# Altium PCB HBridge_V2.2.PcbDoc
Units mm, origin at the board's own origin, x right, y up, seen from the top; angles counter-clockwise.
Board outline 33.02 x 31.75 mm, 2 copper layers (Top Layer, Bottom Layer); 37 components, 32 nets, 126 pads, 32 vias.
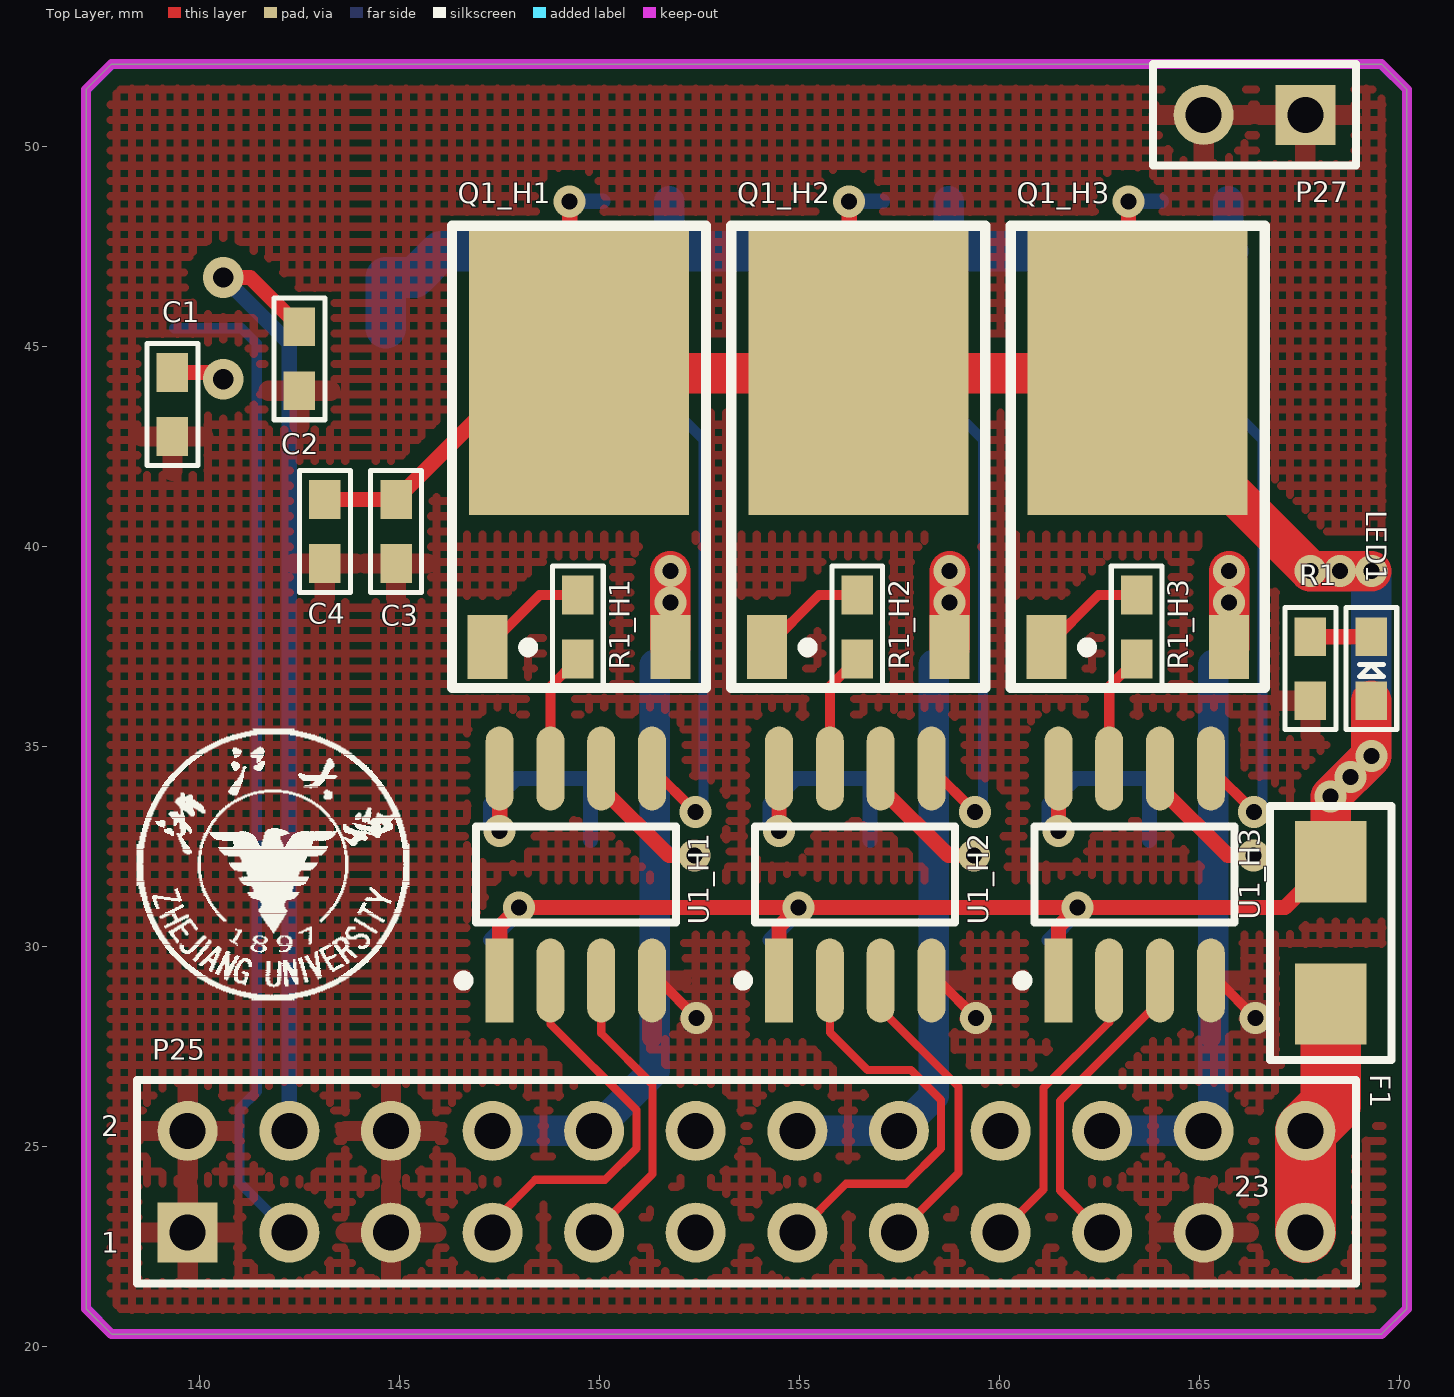
[diagram p0: Top Layer view]
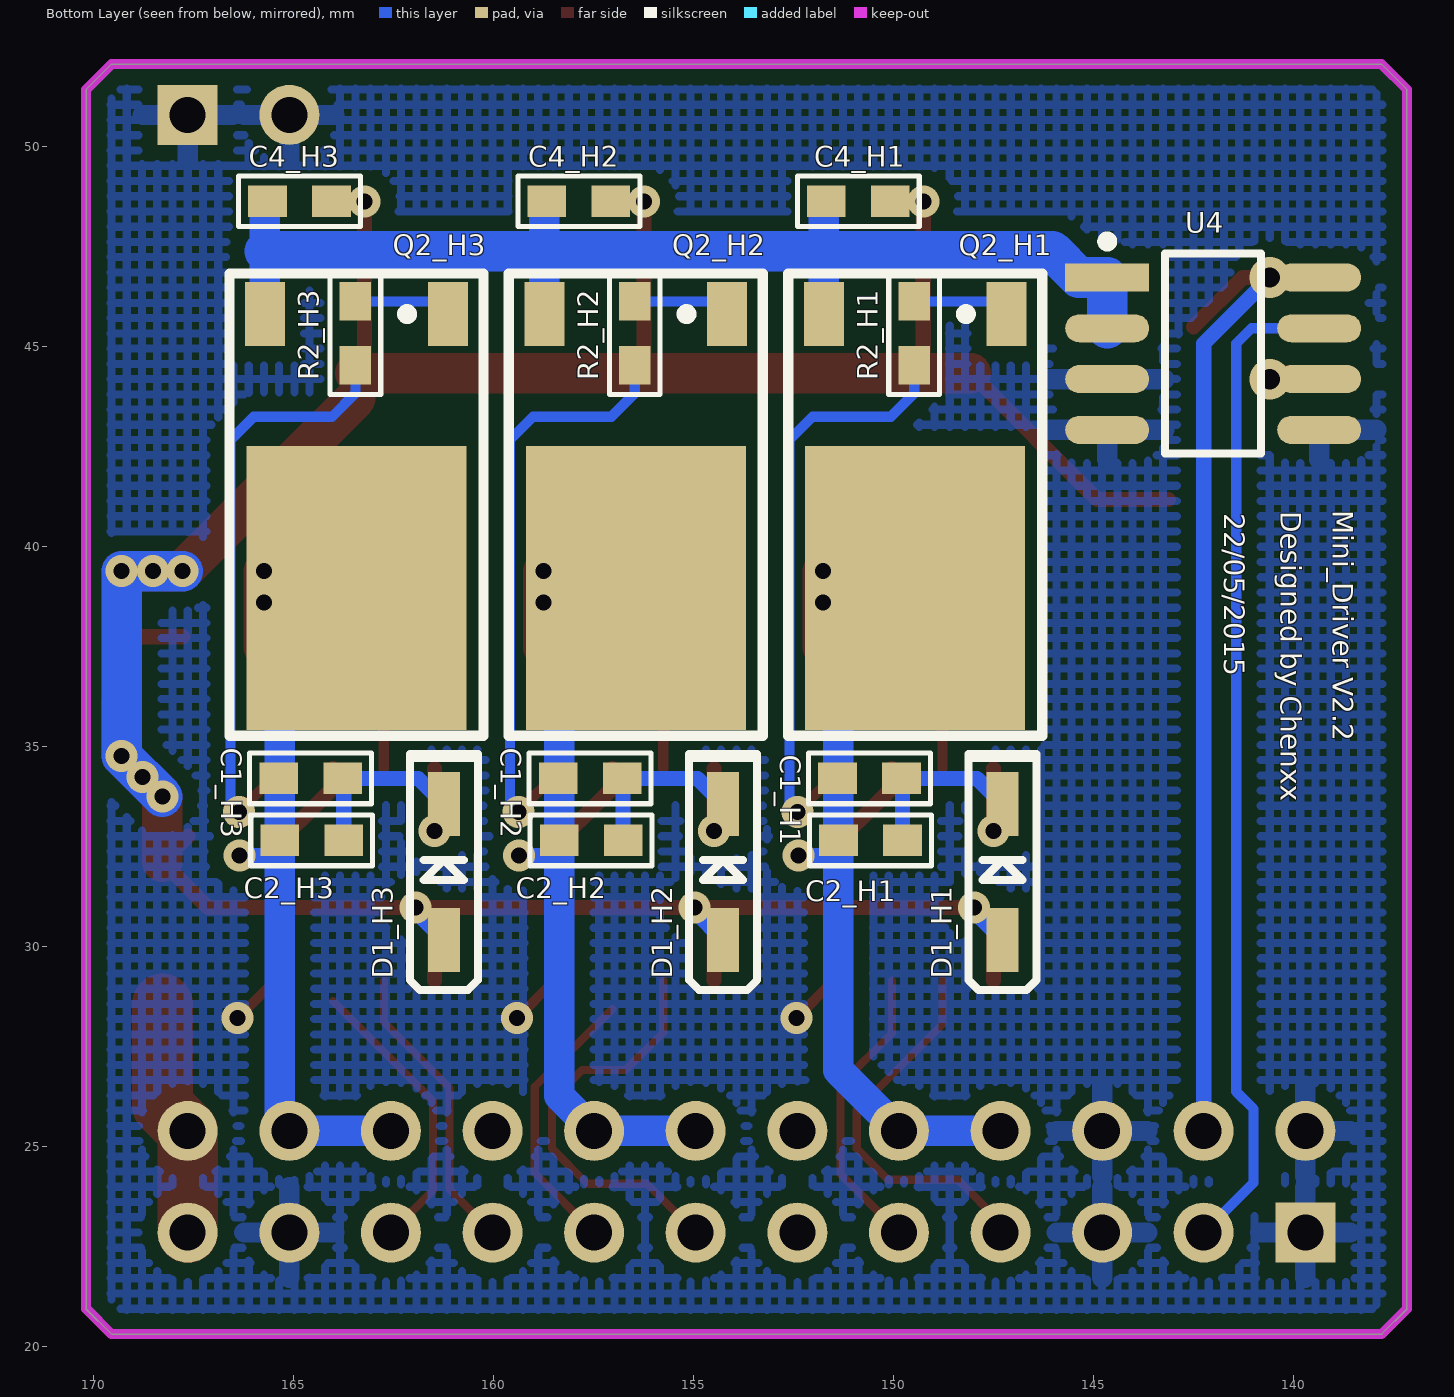
[diagram p1: Bottom Layer view, seen from below]

## Layer stack, top to bottom
Top Layer: signal copper 0.0356
Dielectric: dielectric 0.32, FR-4, Dk 4.8
Bottom Layer: signal copper 0.0356

## Board outline
137.795,52.07 137.16,51.435 137.16,20.955 137.795,20.32 169.545,20.32 170.18,20.955 170.18,51.435 169.545,52.07

## Design rules (kind name [scope] priority, off if disabled: settings)
Clearance Clearance_1 [(InPolygon)] p1: gap=0.381
Clearance [All] p2: gap=0.203
ComponentClearance [All] p1 off: gap=0.254 collisioncheckmode=3 verticalgap=0.254 showdistances=FALSE
Height [All] p1 off: minheight=0 maxheight=25.4 prefheight=12.7
MinimumSolderMaskSliver [All] p1 off: minsoldermaskwidth=0.254
PlaneConnect [All] p1: planeconnectstyle=Relief reliefexpansion=0.508 reliefentries=4 reliefconductorwidth=0.508 reliefairgap=0.254
PolygonConnect PolygonConnect_1 [IsVia] p1: connectstyle=Direct reliefconductorwidth=0.381 reliefentries=4 polygonreliefangle="90 Angle"
PolygonConnect [All] p2: connectstyle=Relief reliefconductorwidth=0.508 reliefentries=4 polygonreliefangle="90 Angle"
RoomDefinition H3 [InComponentClass('H3')] p1: confinementstyle=ConfineIn formatcopy=TRUE lockcomponents=FALSE outline 159.995,27.356 167.005,27.356 167.005,49.53 159.995,49.53
RoomDefinition H2 [InComponentClass('H2')] p2: confinementstyle=ConfineIn formatcopy=TRUE lockcomponents=FALSE outline 153.01,27.356 160.02,27.356 160.02,49.53 153.01,49.53
RoomDefinition H1 [InComponentClass('H1')] p3: confinementstyle=ConfineIn formatcopy=TRUE lockcomponents=FALSE outline 146.025,27.356 153.035,27.356 153.035,49.53 146.025,49.53
RoomDefinition Sheet1 [InComponentClass('Sheet1')] p4: confinementstyle=ConfineIn formatcopy=TRUE lockcomponents=FALSE outline 132.08,17.78 183.794,17.78 183.794,58.42 132.08,58.42
RoutingVias [All] p1: holewidth=0.711 width=1.27 viastyle="Through Hole" minholewidth=0.1 minwidth=0.1 maxholewidth=5 maxwidth=5
SilkToSilkClearance [All] p1 off: silktosilkclearance=0.254
SilkscreenOverComponentPads [All] p1 off: minsilkscreentomaskgap=0.254
SolderMaskExpansion [All] p1: expansion=0.102
TestPointUsage [All] p1: valid=0 allowmultiple=FALSE
Testpoint [All] p1: side=15 testpointundercomponent=TRUE minsize=1.016 maxsize=2.54 preferedsize=1.524 minholesize=0 maxholesize=1.016 preferedholesize=0.813 testpointgrid=0.025 style=1023 order=0123456789
Width [All] p1: maxlimit=2.54 minlimit=0.203 preferedwidth=0.254
18 further rules are at their usual default settings.

## Classes and differential pairs
net class WOUT[1..3]: WOUT1 WOUT2 WOUT3
channel class HalfBridge: H1 H2 H3
component class H3: C1_H3 C2_H3 C4_H3 D1_H3 Q1_H3 Q2_H3 R1_H3 R2_H3 U1_H3
component class H2: C1_H2 C2_H2 C4_H2 D1_H2 Q1_H2 Q2_H2 R1_H2 R2_H2 U1_H2
component class H1: C1_H1 C2_H1 C4_H1 D1_H1 Q1_H1 Q2_H1 R1_H1 R2_H1 U1_H1
net class LIN[1..3]: LIN1 LIN2 LIN3
net class HIN[1..3]: HIN1 HIN2 HIN3
component class Sheet1: C1 C2 C3 C4 F1 LED1 P25 P27 R1 U4

## Components (designator, comment, footprint, x,y, rotation, side; value= is the part's Value field where it differs from the comment)
C1 "1nF" 0603 139.319,43.561 r90 top
C1_H1 "1uF" 0603 150.597,34.214 r0 bottom (schematic designator C1)
C1_H2 "1uF" 0603 157.582,34.214 r0 bottom (schematic designator C1)
C1_H3 "1uF" 0603 164.567,34.214 r0 bottom (schematic designator C1)
C2 "0.1uF" 0603 142.494,44.704 r90 top
C2_H1 "0.1uF" 0603 150.571,32.664 r0 bottom (schematic designator C2)
C2_H2 "0.1uF" 0603 157.556,32.664 r0 bottom (schematic designator C2)
C2_H3 "0.1uF" 0603 164.541,32.664 r0 bottom (schematic designator C2)
C3 "0.1uF" 0603 144.907,40.386 r90 top
C4 "10uF" 0603 143.129,40.386 r90 top
C4_H1 "0.22uF" 0603 150.876,48.641 r180 bottom (schematic designator C4)
C4_H2 "0.22uF" 0603 157.861,48.641 r180 bottom (schematic designator C4)
C4_H3 "0.22uF" 0603 164.846,48.641 r180 bottom (schematic designator C4)
D1_H1 "1N5819" SOD-123 147.269,30.175 r90 bottom (schematic designator D1)
D1_H2 "1N5819" SOD-123 154.254,30.175 r90 bottom (schematic designator D1)
D1_H3 "1N5819" SOD-123 161.239,30.175 r90 bottom (schematic designator D1)
F1 "FUSE" FUSE 168.275,28.575 r180 top
LED1 "led" 0603_diode 169.291,36.957 r90 top
P25 "Header 12X2" HDR2X12 139.7,22.86 r0 top
P27 "Header 2" HDR1X2 167.64,50.8 r180 top
Q1_H1 "IRFRU1205" TO-252 152.654,48.031 r90 top (schematic designator Q1)
Q1_H2 "IRFRU1205" TO-252 159.639,48.031 r90 top (schematic designator Q1)
Q1_H3 "IRFRU1205" TO-252 166.624,48.031 r90 top (schematic designator Q1)
Q2_H1 "IRFRU1205" TO-252 152.629,35.281 r270 bottom (schematic designator Q2)
Q2_H2 "IRFRU1205" TO-252 159.614,35.281 r270 bottom (schematic designator Q2)
Q2_H3 "IRFRU1205" TO-252 166.599,35.281 r270 bottom (schematic designator Q2)
R1 "res" 0603 167.767,36.957 r90 top
R1_H1 "100R" 0603 149.454,37.998 r90 top (schematic designator R1)
R1_H2 "100R" 0603 156.439,37.998 r90 top (schematic designator R1)
R1_H3 "100R" 0603 163.424,37.998 r90 top (schematic designator R1)
R2_H1 "100R" 0603 149.479,45.339 r90 bottom (schematic designator R2)
R2_H2 "100R" 0603 156.464,45.339 r90 bottom (schematic designator R2)
R2_H3 "100R" 0603 163.449,45.339 r90 bottom (schematic designator R2)
U1_H1 "IR2103" SOIC-8 147.498,29.159 r0 top (schematic designator U1)
U1_H2 "IR2103" SOIC-8 154.483,29.159 r0 top (schematic designator U1)
U1_H3 "IR2103" SOIC-8 161.468,29.159 r0 top (schematic designator U1)
U4 "ACS712" SOIC-8 144.653,46.736 r270 bottom

## Footprints (in the part's own frame and the unit in brackets; to place one, negate y for a bottom-side part, rotate by r counter-clockwise, add the part's x,y. Pads: shape width x height; smd on the part's side, far side on the other; paste and mask are expansions set on the pad)
0603 [mil]
  rect 38x31 smd: 1(-31.5,0) 2(31.5,0)
  silkscreen extent -60,-25 60,25
0603_diode [mil]
  rect 38x31 smd: 1(-31.5,0) 2(31.5,0)
  silkscreen extent -60,-25 60,25
FUSE [mil]
  rect 70x80 smd: 1(0,0) 2(0,-140)
  silkscreen extent -60,-195 60,55
HDR1X2 [mm] "Connector; Header; 2 Position"
  rect 1.5x1.5 hole 0.9: 1(0,0)
  round 1.5 hole 0.9: 2(2.54,0)
  silkscreen extent -1.27,-1.27 3.81,1.27
HDR2X12 [mm] "Connector; Header; 12x2 Position"
  rect 1.5x1.5 hole 0.9: 1(0,0)
  round 1.5 hole 0.9: 2(0,2.54) 3(2.54,0) 4(2.54,2.54) 5(5.08,0) 6(5.08,2.54) 7(7.62,0) 8(7.62,2.54) 9(10.16,0) 10(10.16,2.54) 11(12.7,0) 12(12.7,2.54) 13(15.24,0) 14(15.24,2.54) 15(17.78,0) 16(17.78,2.54) 17(20.32,0) 18(20.32,2.54) 19(22.86,0) 20(22.86,2.54) 21(25.4,0) 22(25.4,2.54) 23(27.94,0) 24(27.94,2.54)
  silkscreen extent -1.27,-1.27 29.21,3.81
SOD-123 [mm]
  rect 1.6x0.8 smd: A(0,0) K(3.4,0)
  silkscreen extent -1.25,-0.85 4.65,0.85
SOIC-8 [mm]
  rect 0.7x2.1 smd: 1(0,0)
  oval 0.7x2.1 smd: 2(1.27,0) 3(2.54,0) 4(3.81,0) 5(3.81,5.3) 6(2.54,5.3) 7(1.27,5.3) 8(0,5.3)
  silkscreen extent -1.02,-0.12 4.41,3.85
TO-252 [mm]
  rect 1.6x1 smd: 1(-10.537,5.46) 3(-10.537,0.89)
  rect 7.1x5.5 smd: 2(-3.687,3.175)
  silkscreen extent -11.56,0 0,6.35

## Part data
C1 C1_H1 C1_H2 C1_H3 C2 C2_H1 C2_H2 C2_H3 C3 C4 C4_H1 C4_H2 C4_H3: library part cap
D1_H1 D1_H2 D1_H3: library part diode
P25: "Header, 12-Pin, Dual row"
P27: "Header, 2-Pin"
R1_H1 R1_H2 R1_H3 R2_H1 R2_H2 R2_H3: library part res

## Via types
v1: diameter 0.8, hole 0.4, Top Layer to Bottom Layer, 30 vias
v2: diameter 1.016, hole 0.508, Top Layer to Bottom Layer, 2 vias

## Nets (pads, with @x,y where several pads share a name; then routed paths per layer and width w, separated by ;. In a path a pad name is that pad's centre, name@x,y a point inside that pad or via, vN(x,y) a via of type N, cw(c..) or ccw(c..) an arc to the next point about the centre after c; other vN are vias at no path point)
16V_REGULATOR: F1.1 P25.23 P25.24 | length 6
  Top Layer w1.524: P25.23 P25.24 168.275,26.035 F1.1
+5V: C2.2 P25.4 U4.8 | length 24.4
  Top Layer w0.381: v2(140.589,46.736) 141.262,46.736 C2.2
  Bottom Layer w0.381: v2(140.589,46.736) 142.24,45.085 P25.4
+16V: C3.2 C4.2 C4_H1.2 C4_H2.2 C4_H3.2 D1_H1.A D1_H2.A D1_H3.A F1.2 LED1.1 Q1_H1.2 Q1_H2.2 Q1_H3.2 U1_H1.1 U1_H2.1 U1_H3.1 | length 87
  Top Layer w0.381: C4.2 C3.2 Q1_H1.2@148.065,44.344 ; U1_H1.1 147.498,30.505 v1(147.98,30.988) 167.132,30.988 F1.2 F1.2@167.64,32.766 ; Q1_H1.2@149.25,44.573 v1(149.25,48.641) ; U1_H2.1 154.483,30.505 v1(154.965,30.988) ; Q1_H2.2@156.235,44.573 v1(156.235,48.641) ; U1_H3.1 161.468,30.505 v1(161.95,30.988) ; Q1_H3.2@163.22,44.573 v1(163.22,48.641)
  Top Layer w1.016: Q1_H1.2@148.065,44.344 Q1_H3.2 ; Q1_H3.2@163.449,43.713 v1(167.767,39.395) v1(169.291,39.395) ; F1.2 v1(168.275,33.757) v1(169.291,34.773) LED1.1
  Bottom Layer w0.381: D1_H1.A v1@147.98,30.886 ; v1(149.25,48.641) C4_H1.2 ; D1_H2.A v1@154.965,30.886 ; v1(156.235,48.641) C4_H2.2 ; D1_H3.A v1@161.95,30.886 ; v1(163.22,48.641) C4_H3.2
  Bottom Layer w0.508: v1@147.98,30.886 v1(147.98,30.988) ; v1@154.965,30.886 v1(154.965,30.988) ; v1@161.95,30.886 v1(161.95,30.988)
  Bottom Layer w1.016: v1(167.767,39.395) v1(169.291,39.395) v1(169.291,34.773) v1(168.275,33.757)
  other v1: 168.768,34.25 168.504,39.395
CURRENT: P25.3 U4.7 | length 25.2
  Bottom Layer w0.254: U4.7 141.046,45.466 141.427,45.085 141.427,26.382 140.995,25.95 140.995,24.105 P25.3
GND: C1.1 C2.1 C3.1 C4.1 P25.1 P25.2 P25.5 P25.6 P25.21 P27.1 P27.2 R1.1 U1_H1.4 U1_H2.4 U1_H3.4 U4.3 U4.4 U4.5 | length 4.2
  Top Layer w0.254: U1_H1.4 151.486,29.159 v1(152.425,28.219) ; U1_H2.4@158.471,29.159 v1(159.41,28.219) ; U1_H3.4@165.456,29.159 v1(166.395,28.219)
HIN1: P25.7 U1_H1.2 | length 9.6
  Top Layer w0.203: P25.7 147.32,23.114 148.387,24.181 150.133,24.181 150.915,24.963 150.915,25.92 148.768,28.067 ; U1_H1.2@148.768,28.118 U1_H1.2
HIN2: P25.13 U1_H2.2 | length 10.5
  Top Layer w0.203: P25.13 156.159,24.079 157.651,24.079 158.535,24.963 158.535,26.174 157.785,26.924 156.693,26.924 155.753,27.864 U1_H2.2
HIN3: P25.17 U1_H3.2 | length 7.4
  Top Layer w0.203: P25.17 161.099,23.939 161.099,26.479 162.738,28.118 U1_H3.2
LIN1: P25.9 U1_H1.3 | length 7.4
  Top Layer w0.203: P25.9 151.321,24.321 151.321,26.558 150.038,27.841 U1_H1.3
LIN2: P25.15 U1_H2.3 | length 7
  Top Layer w0.203: U1_H2.3@157.023,28.448 158.965,26.506 158.965,24.345 P25.15
LIN3: P25.19 U1_H3.3 | length 7.3
  Top Layer w0.203: P25.19 161.505,23.915 161.505,26.149 U1_H3.3@164.008,28.651
NetC1_2: C1.2 U4.6 | length 1.3
  Top Layer w0.254: v2@140.424,44.361 v2(140.589,44.196)
  Top Layer w0.381: C1.2 v2@140.424,44.361
NetC1_H1_1: C1_H1.1 C2_H1.1 D1_H1.K U1_H1.8 | length 6.7
  Top Layer w0.381: v1(147.498,32.893) U1_H1.8
  Bottom Layer w0.381: v1(147.498,32.893) 147.269,33.122 D1_H1.K 147.908,34.214 C1_H1.1 ; C2_H1.1 C1_H1.1@149.771,34.188
NetC1_H2_1: C1_H2.1 C2_H2.1 D1_H2.K U1_H2.8 | length 6.7
  Top Layer w0.381: v1(154.483,32.893) U1_H2.8
  Bottom Layer w0.381: v1(154.483,32.893) 154.254,33.122 D1_H2.K 154.893,34.214 C1_H2.1 ; C2_H2.1 C1_H2.1@156.756,34.188
NetC1_H3_1: C1_H3.1 C2_H3.1 D1_H3.K U1_H3.8 | length 6.7
  Top Layer w0.381: v1(161.468,32.893) U1_H3.8
  Bottom Layer w0.381: v1(161.468,32.893) 161.239,33.122 D1_H3.K 161.878,34.214 C1_H3.1 ; C2_H3.1 C1_H3.1@163.741,34.188
NetLED1_2: LED1.2 R1.2 | length 1.5
  Top Layer w0.381: R1.2 LED1.2
NetQ1_H1_1: Q1_H1.1 R1_H1.2 | length 2.8
  Top Layer w0.254: Q1_H1.1 148.498,38.798 R1_H1.2
NetQ1_H2_1: Q1_H2.1 R1_H2.2 | length 2.8
  Top Layer w0.254: Q1_H2.1 155.483,38.798 R1_H2.2
NetQ1_H3_1: Q1_H3.1 R1_H3.2 | length 2.8
  Top Layer w0.254: Q1_H3.1 162.468,38.798 R1_H3.2
NetQ2_H1_1: Q2_H1.1 R2_H1.2 | length 2.4
  Bottom Layer w0.254: Q2_H1.1@147.49,46.139 R2_H1.2
  Bottom Layer w0.381: Q2_H1.1 Q2_H1.1@147.49,46.139
NetQ2_H2_1: Q2_H2.1 R2_H2.2 | length 2.4
  Bottom Layer w0.254: Q2_H2.1@154.475,46.139 R2_H2.2
  Bottom Layer w0.381: Q2_H2.1 Q2_H2.1@154.475,46.139
NetQ2_H3_1: Q2_H3.1 R2_H3.2 | length 2.4
  Bottom Layer w0.254: Q2_H3.1@161.46,46.139 R2_H3.2
  Bottom Layer w0.381: Q2_H3.1 Q2_H3.1@161.46,46.139
NetR1_H1_1: R1_H1.1 U1_H1.7 | length 3
  Top Layer w0.254: U1_H1.7 148.768,36.512 R1_H1.1
NetR1_H2_1: R1_H2.1 U1_H2.7 | length 3
  Top Layer w0.254: U1_H2.7 155.753,36.512 R1_H2.1
NetR1_H3_1: R1_H3.1 U1_H3.7 | length 3
  Top Layer w0.254: U1_H3.7 162.738,36.512 R1_H3.1
NetR2_H1_1: R2_H1.1 U1_H1.5 | length 15.4
  Top Layer w0.254: U1_H1.5 v1(152.391,33.376) v1@152.603,33.376
  Bottom Layer w0.254: R2_H1.1 149.479,43.84 150.063,43.256 152.022,43.256 152.597,42.681 152.597,33.582 v1(152.391,33.376)
NetR2_H2_1: R2_H2.1 U1_H2.5 | length 15.4
  Top Layer w0.254: U1_H2.5 v1(159.376,33.376) v1@159.588,33.376
  Bottom Layer w0.254: R2_H2.1 156.464,43.84 157.048,43.256 159.007,43.256 159.582,42.681 159.582,33.582 v1(159.376,33.376)
NetR2_H3_1: R2_H3.1 U1_H3.5 | length 15.4
  Top Layer w0.254: U1_H3.5 v1(166.361,33.376) v1@166.573,33.376
  Bottom Layer w0.254: R2_H3.1 163.449,43.84 164.033,43.256 165.992,43.256 166.567,42.681 166.567,33.582 v1(166.361,33.376)
PGND: C4_H1.1 C4_H2.1 C4_H3.1 Q2_H1.3 Q2_H2.3 Q2_H3.3 U4.1 U4.2 | length 31.1
  Bottom Layer w0.762: Q2_H1.3 C4_H1.1@151.739,48.641 ; Q2_H2.3 C4_H2.1@158.724,48.641 ; Q2_H3.3 C4_H3.1@165.709,48.641
  Bottom Layer w1.016: U4.2 U4.1 145.365,46.736 146.025,47.396 165.709,47.396
WOUT1: C1_H1.2 C2_H1.2 P25.8 P25.10 Q1_H1.3 Q2_H1.2 U1_H1.6 | length 21.4
  Top Layer w0.381: U1_H1.6 150.038,33.977 151.732,32.283 v1(152.375,32.283)
  Top Layer w1.016: Q1_H1.3 v1(151.764,39.394)
  Bottom Layer w0.381: C2_H1.2 151.752,32.283 v1(152.375,32.283)
  Bottom Layer w0.762: P25.8 P25.10 151.371,26.911 C2_H1.2 Q2_H1.2@151.371,37.05
  other v1: 151.764,38.608
WOUT2: C1_H2.2 C2_H2.2 P25.14 P25.16 Q1_H2.3 Q2_H2.2 U1_H2.6 | length 21.1
  Top Layer w0.381: U1_H2.6 157.023,33.977 158.717,32.283 v1(159.36,32.283)
  Top Layer w1.016: Q1_H2.3 v1(158.749,39.394)
  Bottom Layer w0.381: C2_H2.2 158.737,32.283 v1(159.36,32.283)
  Bottom Layer w0.762: P25.14 P25.16 158.356,26.276 C2_H2.2 Q2_H2.2@158.356,37.05
  other v1: 158.749,38.608
WOUT3: C1_H3.2 C2_H3.2 P25.20 P25.22 Q1_H3.3 Q2_H3.2 U1_H3.6 | length 20.9
  Top Layer w0.381: U1_H3.6 164.008,33.977 165.702,32.283 v1(166.345,32.283)
  Top Layer w1.016: Q1_H3.3 v1(165.734,39.394)
  Bottom Layer w0.381: C2_H3.2 165.722,32.283 v1(166.345,32.283)
  Bottom Layer w0.762: P25.20 P25.22 165.341,25.641 C2_H3.2 Q2_H3.2@165.341,37.05
  other v1: 165.734,38.608
pads on no net: P25.11 P25.12 P25.18

## Polygon pours and split planes (outlines as drawn)
GND on Top Layer "Top Layer-No Net" (hatched 90Degree grid 0.381 track 0.203, remove dead copper): 134.62,53.34 172.72,53.34 172.72,17.78 134.62,17.78
GND on Bottom Layer "Top Layer-No Net" (hatched 90Degree grid 0.381 track 0.203, remove dead copper): 134.62,53.34 172.72,53.34 172.72,17.78 134.62,17.78

## Keep-outs
Keep-Out Layer:
  the board outline again, w0.254

## Silkscreen, mask and mechanical layers (free items; w line width, h text height)
Top Overlay:
  drawing of 1934 lines, arcs and shapes, not listed
Bottom Overlay:
  text "Mini_Driver V2.2" at 139.014,40.919 h0.51 r90
  text "Designed by Chenxx" at 140.31,40.894 h0.51 r90
  text "22/05/2015" at 141.732,40.843 h0.51 r90

## Dimensions
173.99,45.72 to 173.99,25.4 on Top Overlay
172.085,20.194 to 172.72,49.404 on Top Overlay
137.16,53.34 to 170.18,54.61 on Top Overlay
137.795,20.32 to 133.35,52.07 on Top Overlay

## Text inside footprints (layer, text, board x,y; h text height)
P25: Top Overlay "23" at 165.862,23.749 h0.51; Top Overlay "2" at 137.541,25.273 h0.51; Top Overlay "1" at 137.541,22.352 h0.51